# Altium PCB Wearable Air Quality Pendant.pcbdoc
Units mil, origin at the board's own origin, x right, y up, seen from the top; angles counter-clockwise.
Board outline 1917.32 x 1784.06 mil, 2 copper layers (Top Layer, Bottom Layer); 53 components, 58 nets, 184 pads, 66 vias.
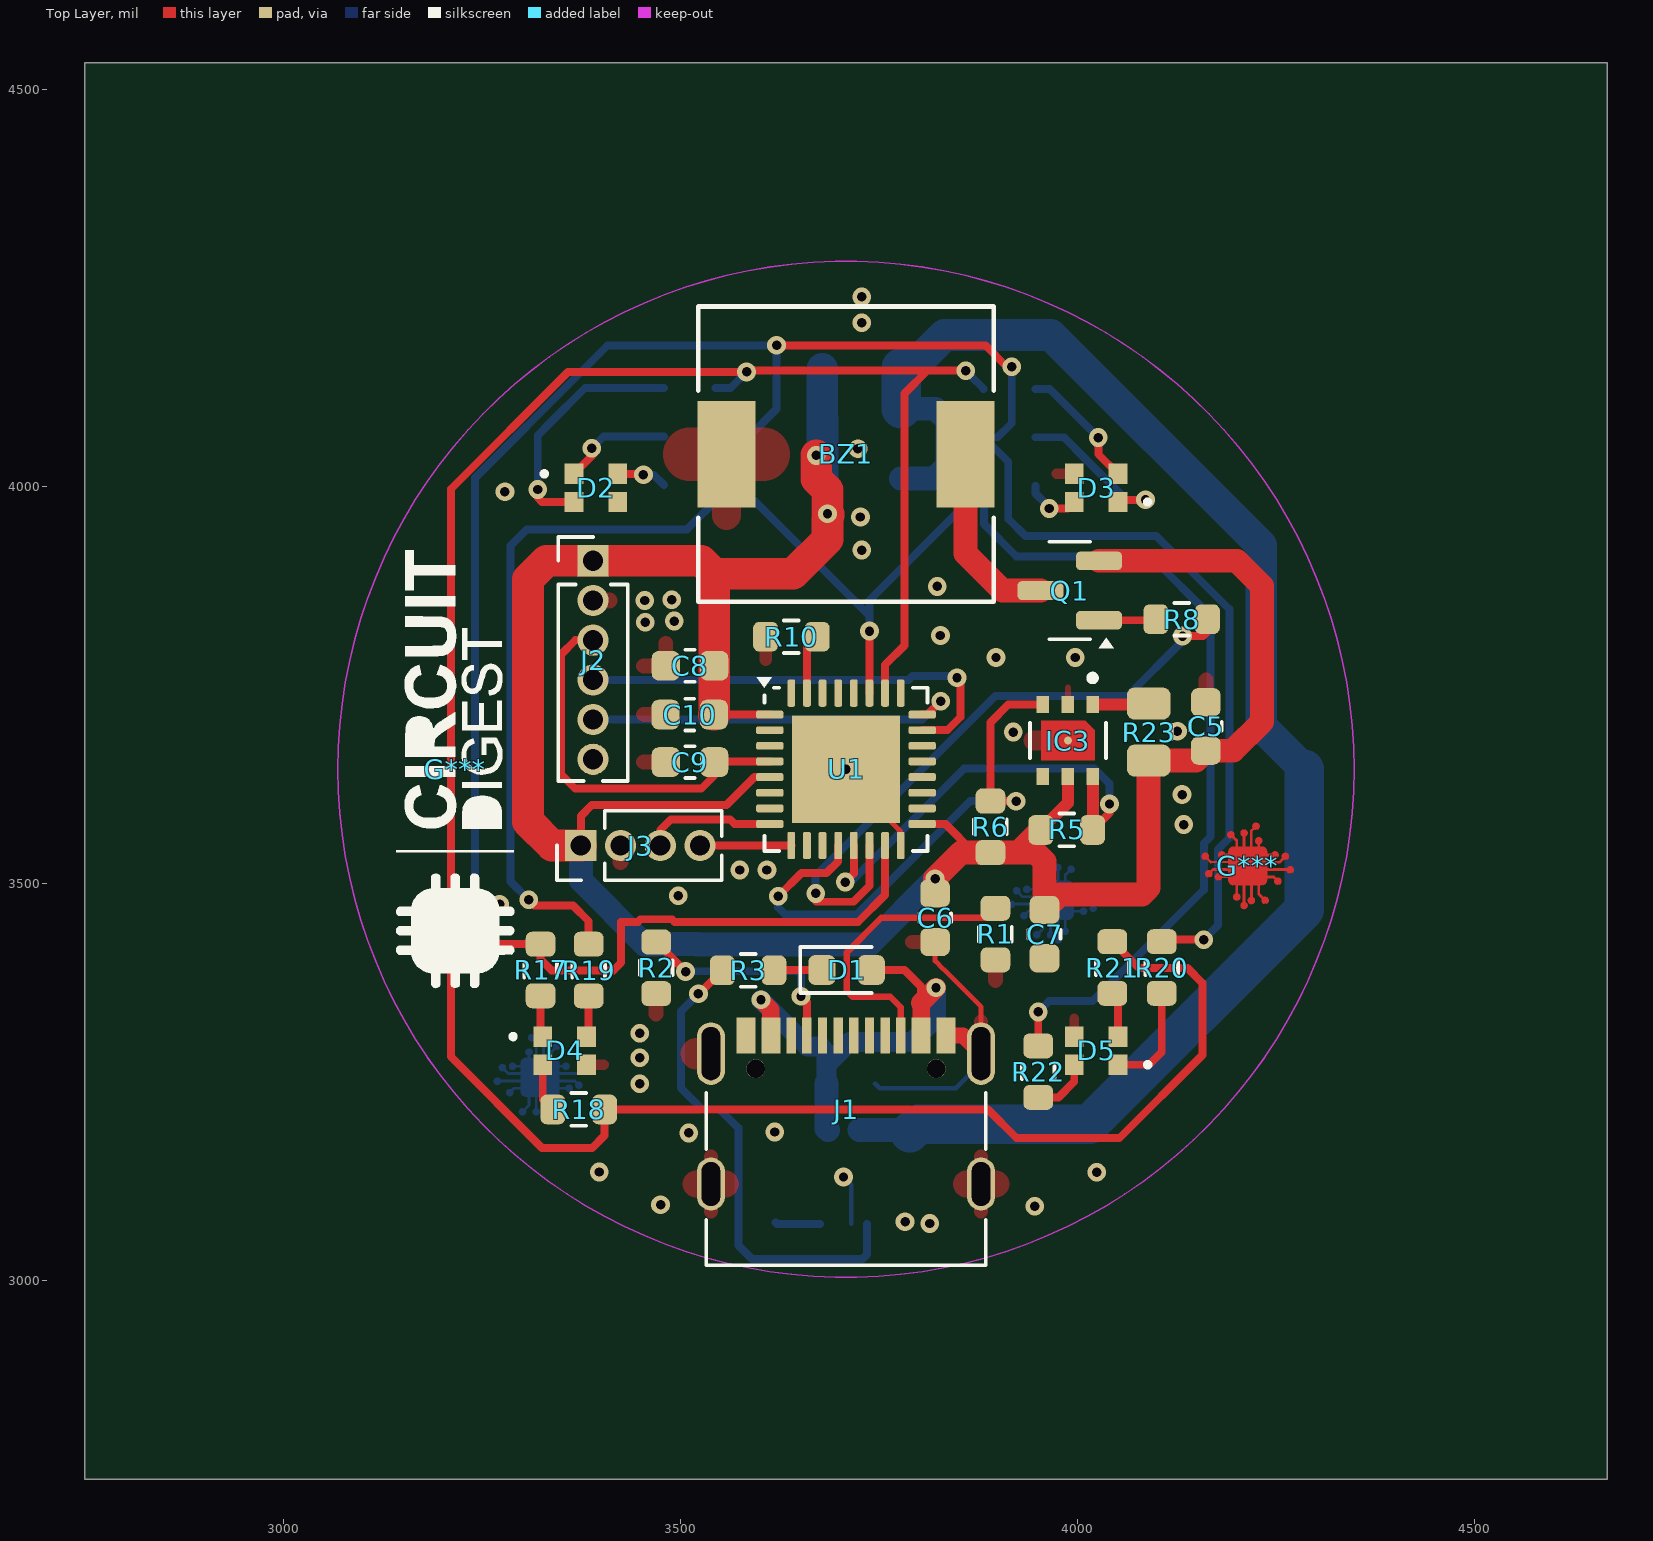
[diagram p0: Top Layer view]
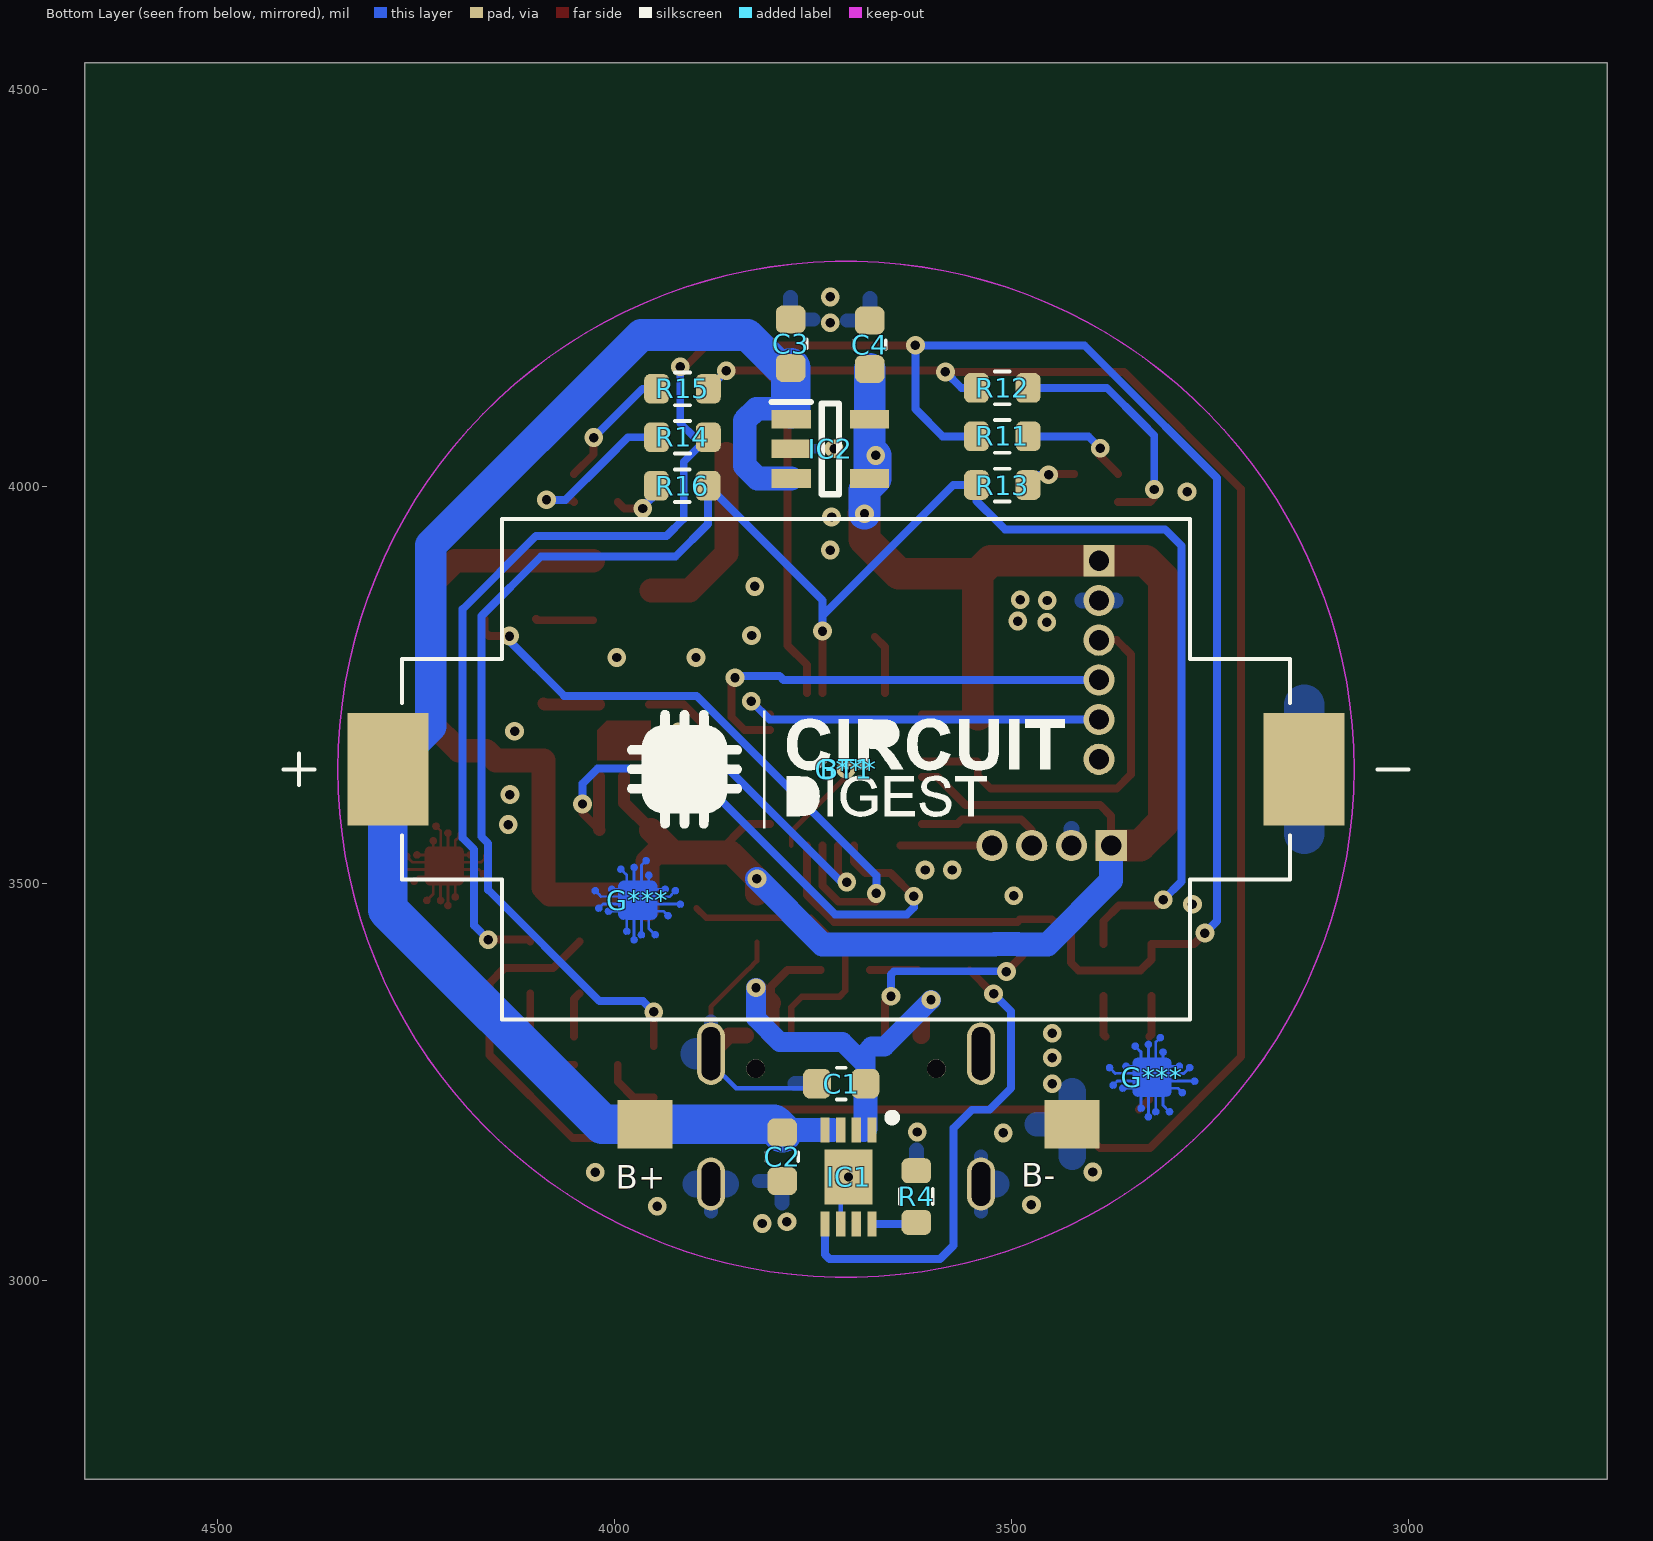
[diagram p1: Bottom Layer view, seen from below]

## Layer stack, top to bottom
Top Layer: signal copper (thickness not stored)
Dielectric: dielectric 12.6, FR-4, Dk 4.8
Bottom Layer: signal copper (thickness not stored)

## Board outline
4667.32,2750 2750,2750 2750,4534.06 4667.32,4534.06

## Design rules (kind name [scope] priority, off if disabled: settings)
BoardOutlineClearance safeClearance [All] p0: genericclearance=10 ignorepadtopadclearanceinfootprint=FALSE except(0: Track-CutoutEdge SMDPad-CutoutEdge THPad-CutoutEdge Via-CutoutEdge Fill-CutoutEdge Region-CutoutEdge Arc-SplitContinuation Track-SplitContinuation SMDPad-SplitContinuation THPad-SplitContinuation Via-SplitContinuation Fill-SplitContinuation Poly-SplitContinuation Region-SplitContinuation Text-SplitContinuation; 19.7: Track-OutlineEdge SMDPad-OutlineEdge THPad-OutlineEdge Via-OutlineEdge Fill-OutlineEdge Region-OutlineEdge Poly-OutlineEdge Text-OutlineEdge)
Clearance safeClearance [(InNet('GND') OR InNet('+BATT') OR InNet('NET-(BZ1-+)') OR InNet('NET-(D1-A)') OR InNet('/NRST') OR InNet('NET-(D1-K)') OR InNet('NET-(D2-RA)') OR InNet('NET-(D2-BA)') OR InNet('NET-(D2-GA)') OR InNet('NET-(D3-BA)') OR InNet('NET-(D3-GA)') OR InNet('NET-(D3-RA)') OR InNet('NET-(D4-RA)') OR InNet('NET-(D4-BA)') OR InNet('NET-(D4-GA)') OR InNet('NET-(D5-BA)') OR InNet('NET-(D5-GA)') OR InNet('NET-(D5-RA)') OR InNet('NET-(IC1-PROG)') OR InNet('NET-(IC1-STAT)') OR InNet('/SCL') OR InNet('/SDA') OR InNet('NET-(J1-CC2)') OR InNet('NET-(J1-CC1)') OR InNet('/SWDIO') OR InNet('/SWCLK') OR InNet('/TX') OR InNet('/RX') OR InNet('NET-(Q1-B)') OR InNet('/BUZ') OR InNet('/BOOT0') OR InNet('/R_LED') OR InNet('/G_LED') OR InNet('/B_LED') OR InNet('+2.5V') OR InNet('NET-(IC3-VDD)') OR InNet('UNCONNECTED-(U1-PC14-PAD2)') OR InNet('UNCONNECTED-(U1-PC15-PAD3)') OR InNet('/ADC') OR InNet('UNCONNECTED-(U1-PA1-PAD7)') OR InNet('UNCONNECTED-(U1-PA4-PAD10)') OR InNet('UNCONNECTED-(U1-PA5-PAD11)') OR InNet('UNCONNECTED-(U1-PA8-PAD18)') OR InNet('UNCONNECTED-(U1-PA9-PAD19)') OR InNet('UNCONNECTED-(U1-PA10-PAD20)') OR InNet('UNCONNECTED-(U1-PA11-PAD21)') OR InNet('UNCONNECTED-(U1-PA12-PAD22)') OR InNet('UNCONNECTED-(U1-PA15-PAD25)') OR InNet('UNCONNECTED-(U1-PB5-PAD28)') OR InNet('UNCONNECTED-(U1-PB6-PAD29)') OR InNet('UNCONNECTED-(U1-PB7-PAD30)') OR InNet('UNCONNECTED-(J1-D+-PADA6)') OR InNet('UNCONNECTED-(J1-D--PADA7)') OR InNet('UNCONNECTED-(J1-SBU1-PADA8)') OR InNet('UNCONNECTED-(J1-D+-PADB6)') OR InNet('UNCONNECTED-(J1-D--PADB7)') OR InNet('UNCONNECTED-(J1-SBU2-PADB8)') OR InNet('UNCONNECTED-(IC1-NC-PAD7)'))] p1: gap=7 ignorepadtopadclearanceinfootprint=FALSE except(0: Track-Track Track-SMDPad SMDPad-SMDPad Track-THPad SMDPad-THPad THPad-THPad Track-Via SMDPad-Via THPad-Via Via-Via Track-Fill SMDPad-Fill THPad-Fill Via-Fill Fill-Fill Track-Region SMDPad-Region THPad-Region Via-Region Fill-Region Region-Region Track-Poly SMDPad-Poly THPad-Poly Via-Poly Fill-Poly Region-Poly Poly-Poly Track-Text SMDPad-Text THPad-Text Via-Text Fill-Text Region-Text Poly-Text Text-Text Track-Hole SMDPad-Hole THPad-Hole Via-Hole Fill-Hole Region-Hole Poly-Hole Text-Hole; 19.7: Track-Sheet SMDPad-Sheet THPad-Sheet Via-Sheet Fill-Sheet Region-Sheet Poly-Sheet Text-Sheet Sheet-Hole)
DiffPairsRouting differentialPair [All] p1: maxuncoupledlength=10 minlimit=6 maxlimit=6 mostfreqgap=6 toplayer_minwidth=5 toplayer_prefwidth=10 toplayer_maxwidth=100 bottomlayer_minwidth=5 bottomlayer_prefwidth=10 bottomlayer_maxwidth=100
PasteMaskExpansion Common [All] p1: expansion=0
PlaneConnect innerPlane [All] p1: planeconnectstyle=Relief reliefexpansion=20 reliefentries=4 reliefconductorwidth=10 reliefairgap=10
PolygonConnect CopperRegion [All] p1: connectstyle=Relief reliefentries=4 reliefconductorwidth=0 polygonreliefangle="90 Angle" airgapwidth=10
PolygonConnect CopperRegion1 [All] p1: connectstyle=Relief reliefentries=4 reliefconductorwidth=0 polygonreliefangle="90 Angle" airgapwidth=10
RoutingVias viaSize [All] p1: viastyle="Through Hole" holewidth=12.0078 minholewidth=11.811 maxholewidth=236.2204 width=24.0158 minwidth=19.685 maxwidth=393.7008
SolderMaskExpansion Common [All] p1: useseparateexpansions=TRUE expansion=0 expansionbottom=0
Width trackWidth [All] p1: maxlimit=100 minlimit=5 preferedwidth=10

## Components (designator, comment, footprint, x,y, rotation, side; value= is the part's Value field where it differs from the comment)
BT1 "Battery_Cell" 1060:BAT_1060 3708.66,3644.29 r180 bottom
BZ1 "Buzzer" PKMCS0909E4000_R1:PKMCS0909E4000-R1_MUR 3708.66,4041.14 r180 top
C1 "4.7uF" Capacitor_SMD:C_0603_1608Metric 3714.76,3248.43 r180 bottom
C2 "4.7uF" Capacitor_SMD:C_0603_1608Metric 3788.98,3156.3 r90 bottom
C3 "2.2uF" Capacitor_SMD:C_0603_1608Metric 3778.35,4180.12 r270 bottom
C4 "2.2uF" Capacitor_SMD:C_0603_1608Metric 3678.74,4178.94 r270 bottom
C5 "1uF" Capacitor_SMD:C_0603_1608Metric 4161.81,3698.23 r270 top
C6 "4.7uF" Capacitor_SMD:C_0603_1608Metric 3820.87,3457.28 r90 top
C7 "1uF" Capacitor_SMD:C_0603_1608Metric 3958.66,3436.81 r90 top
C8 "100nF" Capacitor_SMD:C_0603_1608Metric 3512.2,3774.61 r0 top
C9 "100nF" Capacitor_SMD:C_0603_1608Metric 3512.2,3653.35 r0 top
C10 "100nF" Capacitor_SMD:C_0603_1608Metric 3511.81,3713.19 r0 top
D1 "LED_Small" LED_SMD:LED_0603_1608Metric 3709.45,3391.54 r0 top
D2 "LED_RGBK" EAST1616RGBA1:EAST1616RGBA1 3393.7,3998.62 r180 top
D3 "LED_RGBK" EAST1616RGBA1:EAST1616RGBA1 4023.62,3998.62 r0 top
D4 "LED_RGBK" EAST1616RGBA1:EAST1616RGBA1 3354.33,3289.96 r180 top
D5 "LED_RGBK" EAST1616RGBA1:EAST1616RGBA1 4023.62,3289.96 r0 top
G*** "LOGO" LOGO#1 3216.54,3644.29 r90 top
G*** "LOGO" LOGO#2 4214.57,3522.64 r0 top
G*** "LOGO" LOGO#2 3323.23,3256.5 r180 bottom
G*** "LOGO" LOGO#1 3708.66,3644.29 r180 bottom
G*** "LOGO" LOGO#2 3970.87,3479.33 r180 bottom
IC1 "MCP73832T-2ACI_MC" MCP73832T-2ACI_MC:SON50P300X200X100-9N-D 3705.51,3130.91 r270 bottom
IC2 "ADPL44002AUJZ" ADPL44002AUJZ-3.3-R7:SOT95P280X100-5N 3728.35,4047.83 r180 bottom
IC3 "SGP40-D-R4" SGP40_D_R4:XCDR_SGP40-D-R4 3988.19,3680.51 r270 top
J1 "USB_C_Receptacle_USB2.0_16P" Connector_USB:USB_C_Receptacle_Palconn_UTC16-G 3708.66,3210.24 r0 top
J2 "SWD" Connector_PinHeader_1.27mm:PinHeader_1x06_P1.27mm_Vertical 3390.16,3906.89 r0 top
J3 "UART" Connector_PinHeader_1.27mm:PinHeader_1x04_P1.27mm_Vertical 3374.8,3548.23 r90 top
Q1 "SS8550" Package_TO_SOT_SMD:SOT-23 3990.35,3869.39 r180 top
R1 "5.1K" Resistor_SMD:R_0603_1608Metric 3896.85,3436.81 r90 top
R2 "5.1K" Resistor_SMD:R_0603_1608Metric 3469.68,3394.29 r90 top
R3 "470R" Resistor_SMD:R_0603_1608Metric 3585.43,3391.14 r0 top
R4 "2K" Resistor_SMD:R_0603_1608Metric 3620.08,3106.3 r270 bottom
R5 "4.7K" Resistor_SMD:R_0603_1608Metric 3986.61,3567.91 r180 top
R6 "4.7K" Resistor_SMD:R_0603_1608Metric 3890.55,3571.85 r270 top
R8 "1K" Resistor_SMD:R_0603_1608Metric 4131.3,3833.27 r180 top
R10 "100K" Resistor_SMD:R_0603_1608Metric 3639.96,3811.22 r0 top
R11 "470R" Resistor_SMD:R_0603_1608Metric 3511.81,4063.58 r180 bottom
R12 "470R" Resistor_SMD:R_0603_1608Metric 3511.81,4124.61 r180 bottom
R13 "470R" Resistor_SMD:R_0603_1608Metric 3511.81,4002.17 r180 bottom
R14 "470R" Resistor_SMD:R_0603_1608Metric 3914.57,4062.4 r0 bottom
R15 "470R" Resistor_SMD:R_0603_1608Metric 3914.57,4123.43 r0 bottom
R16 "470R" Resistor_SMD:R_0603_1608Metric 3914.96,4001.38 r0 bottom
R17 "470R" Resistor_SMD:R_0603_1608Metric 3324.02,3391.54 r270 top
R18 "470R" Resistor_SMD:R_0603_1608Metric 3372.05,3215.94 r180 top
R19 "470R" Resistor_SMD:R_0603_1608Metric 3384.65,3391.54 r270 top
R20 "470R" Resistor_SMD:R_0603_1608Metric 4106.3,3394.68 r270 top
R21 "470R" Resistor_SMD:R_0603_1608Metric 4044.09,3394.68 r270 top
R22 "470R" Resistor_SMD:R_0603_1608Metric 3950.79,3263.58 r270 top
R23 "4.7R" Resistor_SMD:R_0805_2012Metric 4089.76,3691.14 r270 top
U1 "STM32U083KCUx" Package_DFN_QFN:QFN-32-1EP_5x5mm_P0.5mm_EP3.45x3.45mm 3708.66,3644.29 r0 top
? "device_f053" footprint_3556 3961.81,3197.44 r270 bottom
? "device_f053" footprint_3556 3424.02,3197.44 r90 bottom

## Footprints (in the part's own frame and the unit in brackets; to place one, negate y for a bottom-side part, rotate by r counter-clockwise, add the part's x,y. Pads: shape width x height; smd on the part's side, far side on the other; paste and mask are expansions set on the pad)
1060:BAT_1060 [mm]
  rect 2.59x3.61 smd: N(14.655,0) P(-14.655,0)
  silkscreen extent -18,-8 18,8
ADPL44002AUJZ-3.3-R7:SOT95P280X100-5N [mm]
  rect 1.25x0.6 smd: 1(-1.25,0.95) 2(-1.25,0) 3(-1.25,-0.95) 4(1.25,-0.95) 5(1.25,0.95)
  silkscreen extent -1.88,-1.45 0.27,1.5
Capacitor_SMD:C_0603_1608Metric [mm]
  rrect50% 0.9x0.95 smd: 1(-0.775,0) 2(0.775,0)
  silkscreen extent -0.14,-0.51 0.14,0.51
Connector_PinHeader_1.27mm:PinHeader_1x04_P1.27mm_Vertical [mm]
  rect 1x1 hole 0.65: 1(0,0)
  round 1 hole 0.65: 2(0,-1.27) 3(0,-2.54) 4(0,-3.81)
  silkscreen extent -1.11,-4.5 1.11,0.76
Connector_PinHeader_1.27mm:PinHeader_1x06_P1.27mm_Vertical [mm]
  rect 1x1 hole 0.65: 1(0,0)
  round 1 hole 0.65: 2(0,-1.27) 3(0,-2.54) 4(0,-3.81) 5(0,-5.08) 6(0,-6.35)
  silkscreen extent -1.11,-7.04 1.11,0.76
Connector_USB:USB_C_Receptacle_Palconn_UTC16-G [mm]
  rect 0.6x1.16 smd: A1(-3.2,2.51) A4(-2.4,2.51) A9(2.4,2.51) A12(3.2,2.51) B1(3.2,2.51) B4(2.4,2.51) B9(-2.4,2.51) B12(-3.2,2.51)
  rect 0.3x1.16 smd: A5(-1.25,2.51) A6(-0.25,2.51) A7(0.25,2.51) A8(1.25,2.51) B5(1.75,2.51) B6(0.75,2.51) B7(-0.75,2.51) B8(-1.75,2.51)
  oval 0.9x1.7 hole 0.6 slot 1.4 at 90 deg: S1(-4.32,-2.24) S1(4.32,-2.24)
  oval 0.9x2 hole 0.6 slot 1.7 at 90 deg: S1(-4.32,1.93) S1(4.32,1.93)
  round 0.6 hole 0.6 unplated: ""(-2.89,1.45) ""(2.89,1.45)
  silkscreen extent -4.47,-4.84 4.47,0.67
EAST1616RGBA1:EAST1616RGBA1 [mm]
  rect 0.6x0.65 smd: 1(0.7,-0.45) 2(0.7,0.45) 3(-0.7,-0.45) 4(-0.7,0.45)
  silkscreen extent 1.6,-0.5 1.7,-0.4
footprint_3556 [mm]
  rect 1.55x1.75 smd: 9(0,0)
LED_SMD:LED_0603_1608Metric [mm]
  rrect50% 0.875x0.95 smd: 1(-0.787,0) 2(0.788,0)
  silkscreen extent -1.48,-0.73 0.8,0.73
LOGO#1 [mil]
  silkscreen extent -275,-74 276,74
LOGO#2 [mil]
  Top Layer region: -5.26,-10.04 -5.2,-10.24 -5.15,-10.43 -5.1,-10.61 -5.06,-10.77 -5.02,-10.92 -4.98,-11.04 -4.96,-11.15 -4.94,-11.22 -4.92,-11.27 -4.92,-11.29 -4.92,-11.29 -4.93,-11.29 -4.98,-11.29 -5.07,-11.29 -5.18,-11.3 -5.32,-11.3 -5.49,-11.3 -5.68,-11.3 -5.9,-11.3 -6.15,-11.3 -6.41,-11.3 -6.7,-11.3 -7,-11.3 -7.33,-11.3 -7.67,-11.3 -8.02,-11.3 -8.39,-11.3 -8.77,-11.3 -9.16,-11.3 -9.56,-11.3 -9.64,-11.3 -14.36,-11.3 -14.5,-11.25 -14.75,-11.15 -14.97,-11.03 -15.16,-10.89 -15.32,-10.73 -15.43,-10.6 -15.53,-10.42 -15.62,-10.22 -15.69,-10 -15.74,-9.79 -15.75,-9.76 -15.74,-9.74 -15.71,-9.72 -15.66,-9.7 -15.63,-9.69 -15.57,-9.67 -15.49,-9.64 -15.37,-9.59 -15.24,-9.55 -15.09,-9.49 -14.92,-9.43 -14.74,-9.37 -14.55,-9.3 -14.37,-9.23 -13.17,-8.8 -9.38,-8.8 -5.6,-8.8
  Top Layer region: 10.76,-8.85 10.77,-8.88 10.78,-8.94 10.8,-9.02 10.83,-9.13 10.87,-9.26 10.91,-9.41 10.96,-9.58 11.01,-9.76 11.06,-9.95 11.1,-10.09 11.15,-10.28 11.2,-10.47 11.25,-10.64 11.29,-10.8 11.33,-10.94 11.36,-11.06 11.39,-11.16 11.41,-11.23 11.42,-11.27 11.43,-11.28 11.42,-11.29 11.4,-11.29 11.37,-11.29 11.32,-11.29 11.26,-11.29 11.18,-11.29 11.09,-11.3 10.97,-11.3 10.83,-11.3 10.68,-11.3 10.5,-11.3 10.29,-11.3 10.07,-11.3 9.82,-11.3 9.54,-11.3 9.23,-11.3 8.9,-11.3 8.54,-11.3 8.14,-11.3 7.72,-11.3 7.26,-11.3 6.77,-11.3 6.71,-11.3 1.99,-11.3 1.82,-11.25 1.58,-11.15 1.37,-11.03 1.17,-10.88 1.01,-10.71 0.87,-10.52 0.75,-10.31 0.75,-10.29 0.71,-10.21 0.68,-10.11 0.65,-10.01 0.63,-9.91 0.61,-9.83 0.61,-9.8 0.61,-9.73 1.88,-9.26 3.16,-8.8 6.95,-8.8 10.74,-8.8
  Top Layer region: 14.11,-0.33 14.13,-0.35 14.17,-0.38 14.21,-0.43 14.28,-0.5 14.36,-0.59 14.39,-0.62 14.67,-0.93 14.24,-5.28 14.2,-5.66 14.16,-6.04 14.12,-6.41 14.09,-6.76 14.05,-7.1 14.02,-7.43 13.99,-7.75 13.96,-8.04 13.93,-8.32 13.9,-8.57 13.88,-8.81 13.86,-9.02 13.84,-9.2 13.82,-9.36 13.81,-9.49 13.8,-9.6 13.79,-9.67 13.79,-9.71 13.79,-9.71 13.77,-9.78 13.73,-9.87 13.69,-9.97 13.63,-10.08 13.57,-10.19 13.51,-10.3 13.45,-10.39 13.44,-10.41 13.29,-10.59 13.11,-10.77 12.92,-10.92 12.7,-11.06 12.61,-11.11 12.54,-11.14 12.45,-11.18 12.35,-11.21 12.28,-11.24 12.19,-11.27 12.13,-11.29 12.09,-11.3 12.07,-11.3 12.06,-11.3 12.06,-11.3 12.06,-11.3 12.05,-11.28 12.04,-11.23 12.02,-11.15 11.99,-11.05 11.96,-10.93 11.92,-10.78 11.87,-10.62 11.82,-10.44 11.77,-10.25 11.72,-10.05 11.71,-10.04 11.37,-8.79 11.7,-5.49 12.03,-2.19 13.04,-1.27 13.2,-1.13 13.35,-0.99 13.5,-0.86 13.63,-0.74 13.75,-0.63 13.85,-0.54 13.94,-0.46 14.01,-0.4 14.05,-0.36 14.08,-0.33 14.08,-0.33 14.09,-0.33
  Top Layer region: 14.39,11.3 14.45,11.28 14.47,11.28 14.72,11.18 14.94,11.06 15.13,10.92 15.3,10.76 15.44,10.57 15.56,10.36 15.65,10.13 15.71,9.92 15.74,9.77 15.3,5.36 15.25,4.87 15.2,4.42 15.16,4 15.12,3.61 15.09,3.25 15.05,2.92 15.02,2.62 14.99,2.35 14.97,2.11 14.95,1.89 14.93,1.7 14.91,1.53 14.89,1.38 14.88,1.26 14.87,1.15 14.86,1.07 14.85,1.01 14.84,0.96 14.84,0.94 14.83,0.93 14.83,0.93 14.81,0.91 14.77,0.87 14.71,0.82 14.64,0.75 14.56,0.68 14.49,0.62 14.41,0.54 14.33,0.47 14.26,0.41 14.21,0.37 14.18,0.34 14.17,0.33 14.16,0.35 14.12,0.38 14.07,0.44 14,0.52 13.91,0.61 13.81,0.72 13.7,0.85 13.57,0.98 13.44,1.13 13.32,1.26 13.18,1.42 13.05,1.56 12.93,1.7 12.82,1.82 12.72,1.93 12.64,2.03 12.57,2.11 12.52,2.16 12.49,2.2 12.48,2.21 12.48,2.23 12.48,2.28 12.49,2.36 12.5,2.47 12.51,2.61 12.53,2.78 12.55,2.97 12.57,3.18 12.59,3.41 12.62,3.66 12.64,3.94 12.67,4.22 12.7,4.52 12.73,4.84 12.76,5.16 12.8,5.49 12.8,5.52 13.13,8.81 13.72,10.05 13.81,10.25 13.9,10.43 13.98,10.61 14.06,10.77 14.13,10.91 14.19,11.04 14.24,11.14 14.28,11.22 14.31,11.28 14.32,11.31 14.32,11.31 14.34,11.31
  Top Layer region: -2,11.32 -1.96,11.3 -1.9,11.29 -1.83,11.26 -1.76,11.24 -1.69,11.21 -1.63,11.19 -1.62,11.18 -1.43,11.08 -1.25,10.95 -1.09,10.8 -0.97,10.67 -0.87,10.51 -0.78,10.34 -0.7,10.15 -0.65,9.96 -0.63,9.87 -0.63,9.86 -0.62,9.84 -0.62,9.82 -0.62,9.8 -0.62,9.77 -0.62,9.73 -0.63,9.69 -0.63,9.64 -0.63,9.57 -0.64,9.5 -0.65,9.41 -0.66,9.3 -0.67,9.18 -0.68,9.05 -0.69,8.89 -0.71,8.71 -0.73,8.52 -0.75,8.3 -0.78,8.06 -0.8,7.79 -0.83,7.5 -0.86,7.18 -0.9,6.83 -0.93,6.45 -0.98,6.05 -1.02,5.6 -1.05,5.35 -1.48,0.95 -1.81,0.65 -1.9,0.57 -1.98,0.5 -2.06,0.43 -2.11,0.38 -2.15,0.35 -2.16,0.34 -2.18,0.35 -2.21,0.39 -2.27,0.45 -2.35,0.53 -2.45,0.64 -2.57,0.76 -2.7,0.91 -2.86,1.08 -3.02,1.26 -3.18,1.44 -3.32,1.59 -3.44,1.73 -3.54,1.84 -3.62,1.93 -3.69,2.01 -3.74,2.07 -3.78,2.12 -3.81,2.16 -3.84,2.19 -3.85,2.22 -3.86,2.23 -3.86,2.25 -3.86,2.26 -3.86,2.28 -3.86,2.34 -3.85,2.43 -3.84,2.54 -3.82,2.69 -3.81,2.86 -3.79,3.05 -3.77,3.27 -3.74,3.5 -3.72,3.76 -3.69,4.03 -3.66,4.32 -3.63,4.62 -3.6,4.94 -3.57,5.26 -3.54,5.57 -3.21,8.82 -2.62,10.07 -2.53,10.26 -2.44,10.45 -2.35,10.62 -2.28,10.78 -2.21,10.92 -2.15,11.05 -2.1,11.15 -2.06,11.23 -2.04,11.29 -2.02,11.32 -2.02,11.32
  Top Layer region: 2.16,-0.34 2.17,-0.35 2.2,-0.37 2.23,-0.4 2.28,-0.45 2.34,-0.51 2.41,-0.59 2.5,-0.68 2.6,-0.79 2.72,-0.93 2.86,-1.09 3.01,-1.25 3.17,-1.43 3.31,-1.58 3.43,-1.71 3.53,-1.82 3.61,-1.92 3.68,-1.99 3.73,-2.06 3.77,-2.11 3.8,-2.15 3.82,-2.18 3.84,-2.2 3.85,-2.22 3.85,-2.23 3.85,-2.25 3.85,-2.26 3.85,-2.3 3.84,-2.38 3.83,-2.48 3.82,-2.61 3.8,-2.77 3.78,-2.94 3.77,-3.14 3.74,-3.35 3.72,-3.58 3.7,-3.82 3.67,-4.08 3.65,-4.34 3.62,-4.61 3.59,-4.88 3.56,-5.16 3.53,-5.43 3.51,-5.71 3.48,-5.98 3.45,-6.24 3.42,-6.5 3.4,-6.74 3.38,-6.98 3.35,-7.2 3.33,-7.4 3.31,-7.58 3.29,-7.74 3.28,-7.88 3.27,-7.99 3.26,-8.08 3.25,-8.13 3.25,-8.16 3.25,-8.16 3.23,-8.17 3.18,-8.19 3.11,-8.21 3.01,-8.25 2.89,-8.29 2.76,-8.34 2.61,-8.4 2.44,-8.46 2.27,-8.52 2.1,-8.58 1.92,-8.65 1.74,-8.71 1.57,-8.77 1.4,-8.83 1.24,-8.89 1.1,-8.94 0.97,-8.99 0.86,-9.03 0.77,-9.06 0.71,-9.08 0.67,-9.09 0.67,-9.09 0.65,-9.08 0.65,-9.06 0.66,-9.04 0.66,-8.99 0.67,-8.91 0.68,-8.79 0.7,-8.65 0.71,-8.48 0.73,-8.29 0.76,-8.07 0.78,-7.83 0.81,-7.57 0.84,-7.29 0.87,-6.99 0.9,-6.67 0.93,-6.34 0.96,-6 1,-5.65 1.04,-5.28 1.07,-4.98 1.47,-0.93 1.79,-0.64 1.88,-0.56 1.96,-0.49 2.03,-0.43 2.09,-0.38 2.12,-0.34 2.14,-0.33 2.14,-0.33
  Top Layer region: -14.16,-0.33 -14.16,-0.33 -14.13,-0.36 -14.09,-0.4 -14.03,-0.47 -13.95,-0.56 -13.86,-0.66 -13.76,-0.77 -13.66,-0.89 -13.54,-1.02 -13.42,-1.15 -13.3,-1.28 -13.18,-1.42 -13.07,-1.55 -12.95,-1.67 -12.85,-1.78 -12.76,-1.89 -12.68,-1.98 -12.61,-2.05 -12.56,-2.11 -12.53,-2.14 -12.53,-2.15 -12.49,-2.2 -12.78,-5.17 -12.81,-5.49 -12.85,-5.8 -12.88,-6.1 -12.9,-6.38 -12.93,-6.65 -12.96,-6.9 -12.98,-7.14 -13,-7.35 -13.02,-7.55 -13.04,-7.72 -13.06,-7.86 -13.07,-7.98 -13.08,-8.07 -13.09,-8.13 -13.09,-8.16 -13.09,-8.16 -13.11,-8.17 -13.16,-8.19 -13.23,-8.21 -13.33,-8.25 -13.44,-8.29 -13.58,-8.34 -13.73,-8.4 -13.89,-8.46 -14.06,-8.52 -14.24,-8.58 -14.41,-8.64 -14.59,-8.71 -14.76,-8.77 -14.93,-8.83 -15.09,-8.89 -15.23,-8.94 -15.36,-8.99 -15.47,-9.02 -15.56,-9.06 -15.63,-9.08 -15.66,-9.09 -15.67,-9.09 -15.69,-9.08 -15.69,-9.08 -15.68,-9.06 -15.68,-9.01 -15.67,-8.92 -15.66,-8.81 -15.65,-8.67 -15.63,-8.51 -15.61,-8.32 -15.59,-8.11 -15.57,-7.88 -15.54,-7.63 -15.52,-7.37 -15.49,-7.09 -15.46,-6.81 -15.43,-6.51 -15.4,-6.2 -15.37,-5.88 -15.34,-5.56 -15.3,-5.24 -15.27,-4.92 -15.24,-4.59 -15.21,-4.27 -15.17,-3.95 -15.14,-3.64 -15.11,-3.34 -15.08,-3.04 -15.05,-2.76 -15.03,-2.49 -15,-2.24 -14.98,-2 -14.95,-1.78 -14.93,-1.59 -14.92,-1.41 -14.9,-1.26 -14.89,-1.14 -14.88,-1.04 -14.87,-0.97 -14.87,-0.94 -14.86,-0.93 -14.85,-0.92 -14.81,-0.88 -14.76,-0.83 -14.69,-0.77 -14.6,-0.69 -14.52,-0.61 -14.41,-0.52 -14.33,-0.45 -14.27,-0.39 -14.23,-0.36 -14.19,-0.34 -14.17,-0.33
  Top Layer region: -2.23,-0.33 -2.19,-0.37 -2.14,-0.42 -2.08,-0.49 -2,-0.57 -1.95,-0.63 -1.86,-0.73 -1.79,-0.8 -1.75,-0.86 -1.71,-0.9 -1.69,-0.93 -1.68,-0.96 -1.68,-0.98 -1.68,-0.99 -1.68,-1.01 -1.69,-1.07 -1.7,-1.15 -1.71,-1.27 -1.72,-1.41 -1.74,-1.59 -1.76,-1.78 -1.78,-2.01 -1.81,-2.25 -1.83,-2.51 -1.86,-2.8 -1.89,-3.1 -1.92,-3.42 -1.96,-3.76 -1.99,-4.1 -2.03,-4.47 -2.06,-4.84 -2.1,-5.22 -2.12,-5.38 -2.17,-5.89 -2.22,-6.37 -2.26,-6.82 -2.3,-7.23 -2.34,-7.61 -2.38,-7.96 -2.41,-8.28 -2.44,-8.56 -2.47,-8.82 -2.49,-9.04 -2.51,-9.23 -2.53,-9.4 -2.54,-9.53 -2.56,-9.64 -2.57,-9.72 -2.57,-9.77 -2.58,-9.79 -2.6,-9.86 -2.65,-9.95 -2.69,-10.06 -2.75,-10.16 -2.8,-10.25 -2.84,-10.31 -2.99,-10.53 -3.18,-10.73 -3.39,-10.9 -3.62,-11.05 -3.88,-11.17 -4.08,-11.25 -4.17,-11.27 -4.22,-11.29 -4.25,-11.3 -4.27,-11.3 -4.28,-11.3 -4.28,-11.3 -4.28,-11.29 -4.29,-11.27 -4.3,-11.22 -4.32,-11.15 -4.35,-11.04 -4.39,-10.92 -4.43,-10.77 -4.47,-10.61 -4.52,-10.43 -4.58,-10.24 -4.63,-10.04 -4.63,-10.03 -4.97,-8.79 -4.64,-5.49 -4.6,-5.09 -4.57,-4.73 -4.53,-4.4 -4.5,-4.1 -4.48,-3.82 -4.45,-3.58 -4.43,-3.36 -4.41,-3.16 -4.39,-2.99 -4.38,-2.84 -4.36,-2.71 -4.35,-2.59 -4.34,-2.5 -4.33,-2.42 -4.32,-2.35 -4.31,-2.3 -4.31,-2.26 -4.3,-2.22 -4.29,-2.2 -4.29,-2.18 -4.29,-2.17 -4.28,-2.16 -4.28,-2.16 -4.27,-2.15 -4.25,-2.14 -4.21,-2.1 -4.15,-2.04 -4.06,-1.96 -3.96,-1.87 -3.85,-1.77 -3.72,-1.65 -3.58,-1.52 -3.43,-1.39 -3.27,-1.24 -3.24,-1.22 -3.08,-1.08 -2.94,-0.94 -2.79,-0.81 -2.67,-0.7 -2.55,-0.59 -2.45,-0.5 -2.37,-0.43 -2.3,-0.37 -2.26,-0.34 -2.24,-0.32 -2.24,-0.32
  Top Layer region: 12.19,31.59 12.19,31.55 12.19,31.39 12.2,31.26 12.22,31.15 12.26,31.04 12.3,30.92 12.33,30.86 12.42,30.7 12.51,30.56 12.63,30.43 12.69,30.37 12.87,30.22 13.07,30.1 13.29,30.01 13.52,29.95 13.63,29.93 13.7,29.93 13.8,29.93 13.9,29.93 14.01,29.94 14.1,29.96 14.14,29.96 14.36,30.03 14.57,30.12 14.76,30.24 14.94,30.39 15.09,30.56 15.18,30.7 15.29,30.9 15.37,31.12 15.41,31.33 15.42,31.55 15.41,31.76 15.37,31.97 15.3,32.17 15.21,32.36 15.09,32.54 14.95,32.7 14.79,32.84 14.61,32.96 14.41,33.06 14.19,33.13 14.13,33.14 14.02,33.16 13.89,33.17 13.75,33.17 13.61,33.16 13.49,33.15 13.42,33.13 13.18,33.05 12.97,32.94 12.78,32.81 12.61,32.65 12.47,32.47 12.45,32.44 12.36,32.3 12.3,32.16 12.24,32.01 12.23,31.95 12.21,31.89 12.2,31.83 12.19,31.77 12.19,31.69
  Top Layer region: 45.74,12.13 45.74,11.91 45.75,11.88 45.79,11.63 45.87,11.4 45.98,11.19 46.12,10.99 46.26,10.85 46.43,10.7 46.62,10.58 46.83,10.49 47.05,10.43 47.28,10.4 47.53,10.41 47.66,10.42 47.84,10.47 48.03,10.54 48.11,10.58 48.31,10.7 48.49,10.84 48.64,11.01 48.77,11.2 48.88,11.41 48.95,11.63 48.97,11.71 48.99,11.81 48.99,11.93 48.99,12.06 48.99,12.19 48.98,12.31 48.97,12.36 48.91,12.57 48.81,12.78 48.69,12.97 48.55,13.15 48.38,13.3 48.19,13.43 47.99,13.53 47.77,13.6 47.76,13.61 47.61,13.63 47.45,13.65 47.28,13.65 47.11,13.63 46.99,13.61 46.77,13.54 46.57,13.44 46.38,13.31 46.21,13.15 46.18,13.13 46.04,12.95 45.92,12.76 45.83,12.56 45.77,12.35
  Top Layer region: 36.41,-19.43 36.42,-19.5 36.42,-19.55 36.43,-19.61 36.45,-19.67 36.45,-19.7 36.53,-19.93 36.63,-20.14 36.77,-20.33 36.92,-20.49 37.1,-20.64 37.3,-20.76 37.51,-20.85 37.75,-20.91 37.86,-20.92 37.99,-20.93 38.14,-20.92 38.28,-20.91 38.4,-20.88 38.42,-20.88 38.61,-20.82 38.8,-20.72 38.99,-20.61 39.15,-20.47 39.29,-20.32 39.3,-20.32 39.39,-20.19 39.47,-20.03 39.55,-19.87 39.6,-19.72 39.61,-19.69 39.64,-19.56 39.65,-19.41 39.65,-19.25 39.64,-19.09 39.63,-18.95 39.61,-18.89 39.53,-18.67 39.43,-18.46 39.29,-18.27 39.14,-18.09 38.96,-17.95 38.76,-17.83 38.54,-17.73 38.43,-17.7 38.31,-17.68 38.18,-17.66 38.03,-17.66 37.89,-17.66 37.75,-17.67 37.64,-17.7 37.63,-17.7 37.41,-17.78 37.2,-17.89 37,-18.03 36.86,-18.16 36.72,-18.32 36.61,-18.49 36.52,-18.67 36.47,-18.81 36.45,-18.87 36.44,-18.92 36.43,-18.98 36.42,-19.05 36.42,-19.13 36.42,-19.24 36.41,-19.35
  Top Layer region: 20.38,-43.56 20.39,-43.71 20.41,-43.85 20.42,-43.91 20.49,-44.14 20.59,-44.35 20.72,-44.54 20.87,-44.71 21.03,-44.85 21.22,-44.97 21.42,-45.07 21.63,-45.14 21.85,-45.17 22.08,-45.18 22.29,-45.16 22.52,-45.1 22.73,-45.02 22.92,-44.91 23.1,-44.77 23.25,-44.62 23.38,-44.45 23.49,-44.26 23.57,-44.06 23.62,-43.85 23.65,-43.63 23.65,-43.41 23.61,-43.18 23.55,-42.95 23.54,-42.93 23.44,-42.72 23.31,-42.54 23.16,-42.37 22.98,-42.22 22.78,-42.09 22.73,-42.07 22.6,-42.01 22.48,-41.97 22.36,-41.94 22.24,-41.92 22.1,-41.91 22,-41.91 21.89,-41.91 21.81,-41.91 21.74,-41.92 21.69,-41.93 21.63,-41.94 21.58,-41.96 21.38,-42.03 21.2,-42.12 21.04,-42.24 20.88,-42.38 20.73,-42.55 20.66,-42.63 20.59,-42.74 20.53,-42.86 20.47,-42.99 20.43,-43.12 20.42,-43.14 20.4,-43.26 20.38,-43.4
  Top Layer region: 2.98,-43.51 2.98,-43.52 2.98,-43.67 2.99,-43.79 3.01,-43.91 3.04,-44.01 3.08,-44.12 3.12,-44.22 3.23,-44.41 3.37,-44.59 3.53,-44.75 3.71,-44.89 3.85,-44.97 4.05,-45.05 4.25,-45.11 4.29,-45.12 4.39,-45.14 4.51,-45.14 4.63,-45.14 4.76,-45.14 4.88,-45.13 4.98,-45.11 4.98,-45.11 5.21,-45.03 5.42,-44.93 5.61,-44.8 5.78,-44.65 5.92,-44.48 6.05,-44.28 6.14,-44.07 6.2,-43.85 6.21,-43.84 6.22,-43.72 6.23,-43.58 6.23,-43.43 6.22,-43.29 6.2,-43.16 6.18,-43.09 6.1,-42.87 5.99,-42.67 5.85,-42.48 5.69,-42.32 5.51,-42.17 5.3,-42.06 5.09,-41.97 5.01,-41.95 4.9,-41.93 4.76,-41.91 4.61,-41.91 4.45,-41.91 4.31,-41.93 4.2,-41.95 4.19,-41.95 3.96,-42.03 3.75,-42.14 3.56,-42.27 3.39,-42.43 3.25,-42.61 3.13,-42.82 3.04,-43.05 3.02,-43.09 3,-43.15 2.99,-43.2 2.98,-43.26 2.98,-43.32 2.98,-43.41
  Top Layer region: -6.29,-49.96 -6.29,-50.11 -6.28,-50.24 -6.26,-50.35 -6.24,-50.45 -6.2,-50.55 -6.15,-50.67 -6.14,-50.7 -6.01,-50.91 -5.87,-51.1 -5.7,-51.26 -5.5,-51.41 -5.5,-51.41 -5.33,-51.5 -5.14,-51.57 -4.94,-51.63 -4.79,-51.66 -4.71,-51.66 -4.61,-51.66 -4.49,-51.65 -4.37,-51.64 -4.26,-51.62 -4.19,-51.61 -3.97,-51.53 -3.76,-51.43 -3.57,-51.3 -3.4,-51.15 -3.25,-50.98 -3.13,-50.79 -3.03,-50.58 -3.01,-50.54 -2.95,-50.3 -2.92,-50.07 -2.92,-49.84 -2.95,-49.61 -3.01,-49.39 -3.1,-49.19 -3.22,-48.99 -3.36,-48.82 -3.53,-48.66 -3.71,-48.52 -3.92,-48.41 -3.97,-48.39 -4.11,-48.34 -4.25,-48.3 -4.39,-48.28 -4.54,-48.27 -4.62,-48.27 -4.73,-48.27 -4.82,-48.28 -4.9,-48.29 -4.98,-48.31 -5.02,-48.32 -5.26,-48.4 -5.47,-48.5 -5.67,-48.64 -5.84,-48.8 -5.99,-48.98 -6.12,-49.19 -6.13,-49.22 -6.19,-49.34 -6.23,-49.45 -6.26,-49.55 -6.28,-49.65 -6.29,-49.77 -6.29,-49.91
  Top Layer region: -15.47,-39.17 -15.45,-39.38 -15.39,-39.6 -15.31,-39.8 -15.21,-39.99 -15.07,-40.17 -14.91,-40.34 -14.85,-40.38 -14.68,-40.5 -14.49,-40.59 -14.29,-40.67 -14.17,-40.7 -14.1,-40.71 -13.99,-40.72 -13.88,-40.72 -13.77,-40.72 -13.66,-40.72 -13.57,-40.71 -13.57,-40.71 -13.34,-40.65 -13.13,-40.56 -12.93,-40.45 -12.75,-40.3 -12.6,-40.14 -12.46,-39.95 -12.35,-39.75 -12.33,-39.7 -12.26,-39.47 -12.23,-39.25 -12.22,-39.02 -12.25,-38.79 -12.31,-38.57 -12.41,-38.35 -12.49,-38.21 -12.63,-38.03 -12.8,-37.87 -12.98,-37.73 -13.18,-37.62 -13.34,-37.56 -13.47,-37.53 -13.58,-37.5 -13.71,-37.49 -13.85,-37.49 -13.86,-37.49 -14.1,-37.51 -14.33,-37.56 -14.54,-37.64 -14.74,-37.75 -14.93,-37.9 -14.99,-37.96 -15.15,-38.14 -15.27,-38.33 -15.36,-38.53 -15.43,-38.74 -15.46,-38.95
  Top Layer region: -38.49,-13.83 -38.49,-13.96 -38.49,-14.06 -38.47,-14.15 -38.46,-14.24 -38.43,-14.33 -38.4,-14.41 -38.3,-14.62 -38.18,-14.81 -38.03,-14.98 -37.86,-15.13 -37.67,-15.25 -37.46,-15.35 -37.24,-15.42 -37.09,-15.45 -36.99,-15.46 -36.87,-15.46 -36.73,-15.45 -36.6,-15.44 -36.5,-15.42 -36.29,-15.35 -36.09,-15.25 -35.9,-15.13 -35.73,-14.99 -35.63,-14.87 -35.49,-14.67 -35.39,-14.47 -35.31,-14.26 -35.27,-14.05 -35.26,-13.83 -35.27,-13.62 -35.31,-13.42 -35.38,-13.21 -35.47,-13.02 -35.59,-12.85 -35.73,-12.69 -35.9,-12.54 -36.09,-12.42 -36.3,-12.32 -36.4,-12.28 -36.63,-12.23 -36.85,-12.21 -37.08,-12.23 -37.3,-12.27 -37.51,-12.34 -37.72,-12.45 -37.9,-12.58 -38.03,-12.69 -38.16,-12.84 -38.27,-13 -38.36,-13.17 -38.43,-13.36 -38.45,-13.4 -38.46,-13.47 -38.48,-13.53 -38.48,-13.58 -38.49,-13.65 -38.49,-13.74
  Top Layer region: 51.91,-4.95 51.91,-5.17 51.94,-5.39 52,-5.61 52.1,-5.82 52.18,-5.95 52.31,-6.13 52.48,-6.29 52.67,-6.42 52.87,-6.53 53.09,-6.62 53.21,-6.65 53.3,-6.66 53.4,-6.67 53.52,-6.67 53.64,-6.67 53.75,-6.66 53.84,-6.65 53.84,-6.65 54.07,-6.59 54.28,-6.49 54.47,-6.37 54.65,-6.23 54.8,-6.06 54.93,-5.87 55.04,-5.66 55.11,-5.44 55.12,-5.39 55.13,-5.33 55.14,-5.25 55.14,-5.16 55.14,-5.04 55.14,-4.93 55.14,-4.84 55.13,-4.78 55.12,-4.72 55.11,-4.67 55.1,-4.61 55.09,-4.59 55.01,-4.37 54.89,-4.16 54.75,-3.98 54.58,-3.82 54.39,-3.68 54.24,-3.59 54.06,-3.52 53.88,-3.46 53.69,-3.43 53.61,-3.43 53.38,-3.43 53.16,-3.47 52.94,-3.54 52.73,-3.64 52.68,-3.66 52.49,-3.8 52.33,-3.96 52.19,-4.13 52.08,-4.32 52,-4.52 51.94,-4.74
  Top Layer region: 32.81,13.86 32.81,13.64 32.85,13.41 32.91,13.2 33.01,12.99 33.06,12.9 33.2,12.71 33.37,12.55 33.55,12.41 33.75,12.3 33.96,12.22 34.17,12.17 34.4,12.15 34.63,12.17 34.69,12.18 34.92,12.23 35.13,12.31 35.32,12.43 35.5,12.57 35.55,12.61 35.71,12.79 35.84,12.98 35.94,13.2 36.01,13.43 36.03,13.51 36.04,13.6 36.05,13.71 36.05,13.83 36.04,13.96 36.03,14.08 36.01,14.17 36,14.22 35.92,14.44 35.82,14.65 35.68,14.83 35.55,14.97 35.37,15.12 35.17,15.25 34.96,15.34 34.75,15.4 34.53,15.43 34.3,15.43 34.08,15.4 33.86,15.33 33.65,15.24 33.51,15.15 33.41,15.08 33.3,14.98 33.2,14.87 33.11,14.76 33.08,14.72 32.97,14.52 32.88,14.31 32.83,14.09
  Top Layer region: 378 vertices and 0 holes, not listed, extent -22.18,-22.22 22.18,22.23
  Top Layer region: -50.64,-10.07 -50.63,-10.26 -50.6,-10.44 -50.55,-10.6 -50.55,-10.6 -50.47,-10.8 -50.35,-10.99 -50.21,-11.16 -50.04,-11.32 -49.86,-11.45 -49.67,-11.55 -49.56,-11.59 -49.44,-11.63 -49.34,-11.66 -49.23,-11.67 -49.12,-11.68 -48.98,-11.68 -48.97,-11.68 -48.86,-11.67 -48.77,-11.67 -48.7,-11.66 -48.63,-11.64 -48.58,-11.63 -48.35,-11.54 -48.15,-11.43 -47.96,-11.29 -47.85,-11.19 -47.7,-11.01 -47.58,-10.81 -47.49,-10.6 -47.42,-10.38 -47.4,-10.24 -47.39,-10.03 -47.41,-9.82 -47.46,-9.61 -47.53,-9.4 -47.62,-9.23 -47.68,-9.14 -47.76,-9.04 -47.85,-8.94 -47.95,-8.84 -48.05,-8.75 -48.14,-8.68 -48.2,-8.64 -48.41,-8.54 -48.62,-8.47 -48.84,-8.43 -49.05,-8.42 -49.26,-8.44 -49.47,-8.49 -49.67,-8.56 -49.86,-8.66 -50.03,-8.79 -50.19,-8.93 -50.33,-9.1 -50.45,-9.29 -50.54,-9.49 -50.61,-9.72 -50.61,-9.74 -50.63,-9.9
  Top Layer region: -55.2,11.94 -55.17,11.71 -55.1,11.49 -55.03,11.31 -54.91,11.11 -54.77,10.93 -54.61,10.77 -54.42,10.64 -54.23,10.54 -54.02,10.46 -53.8,10.42 -53.57,10.4 -53.34,10.41 -53.15,10.45 -52.95,10.52 -52.75,10.62 -52.57,10.75 -52.41,10.91 -52.26,11.09 -52.24,11.12 -52.16,11.24 -52.1,11.36 -52.05,11.48 -52.01,11.61 -51.99,11.68 -51.98,11.73 -51.97,11.79 -51.96,11.86 -51.96,11.94 -51.96,12.03 -51.96,12.15 -51.97,12.25 -51.97,12.32 -51.98,12.38 -51.99,12.41 -52.07,12.64 -52.18,12.85 -52.31,13.04 -52.46,13.21 -52.64,13.35 -52.84,13.47 -53.04,13.56 -53.27,13.62 -53.49,13.65 -53.73,13.64 -53.96,13.6 -54.1,13.56 -54.29,13.48 -54.46,13.38 -54.63,13.26 -54.71,13.18 -54.87,13 -55,12.81 -55.09,12.6 -55.16,12.39 -55.19,12.16
  Top Layer region: -34.42,13.84 -34.42,13.71 -34.41,13.58 -34.4,13.48 -34.4,13.45 -34.33,13.23 -34.24,13.03 -34.17,12.9 -34.02,12.71 -33.85,12.55 -33.67,12.41 -33.47,12.3 -33.26,12.22 -33.04,12.17 -32.82,12.15 -32.58,12.17 -32.53,12.18 -32.31,12.23 -32.1,12.32 -31.91,12.43 -31.73,12.56 -31.58,12.72 -31.45,12.89 -31.34,13.08 -31.26,13.28 -31.21,13.49 -31.18,13.7 -31.18,13.92 -31.22,14.15 -31.27,14.32 -31.36,14.53 -31.48,14.73 -31.63,14.9 -31.8,15.06 -31.99,15.19 -32.21,15.29 -32.36,15.34 -32.51,15.38 -32.67,15.39 -32.84,15.4 -33.01,15.39 -33.11,15.38 -33.34,15.31 -33.55,15.22 -33.74,15.1 -33.92,14.96 -34.07,14.79 -34.2,14.61 -34.3,14.41 -34.38,14.19 -34.41,14.06 -34.42,13.96
  Top Layer region: -22.82,39.12 -22.82,38.98 -22.79,38.74 -22.74,38.52 -22.65,38.31 -22.52,38.12 -22.37,37.93 -22.34,37.91 -22.16,37.75 -21.97,37.62 -21.76,37.53 -21.53,37.46 -21.47,37.45 -21.37,37.43 -21.24,37.43 -21.11,37.43 -20.98,37.44 -20.86,37.46 -20.81,37.47 -20.58,37.55 -20.37,37.66 -20.18,37.79 -20.01,37.95 -19.86,38.14 -19.74,38.34 -19.65,38.56 -19.63,38.61 -19.62,38.67 -19.6,38.72 -19.6,38.77 -19.59,38.83 -19.59,38.9 -19.59,39 -19.59,39.07 -19.59,39.18 -19.59,39.26 -19.59,39.33 -19.6,39.38 -19.61,39.43 -19.62,39.49 -19.63,39.52 -19.72,39.74 -19.82,39.94 -19.96,40.12 -20.08,40.25 -20.18,40.34 -20.28,40.42 -20.37,40.48 -20.49,40.54 -20.52,40.55 -20.67,40.62 -20.82,40.66 -20.98,40.69 -21.16,40.7 -21.2,40.7 -21.31,40.69 -21.4,40.69 -21.47,40.68 -21.55,40.66 -21.6,40.65 -21.83,40.57 -22.03,40.47 -22.22,40.33 -22.39,40.18 -22.54,39.99 -22.66,39.79 -22.74,39.6 -22.78,39.44 -22.81,39.28
  Top Layer region: -6.24,41.44 -6.24,41.21 -6.21,40.99 -6.18,40.88 -6.09,40.66 -5.98,40.46 -5.84,40.28 -5.68,40.12 -5.51,39.98 -5.31,39.87 -5.1,39.79 -5,39.76 -4.94,39.75 -4.89,39.74 -4.86,39.73 -4.86,39.73 -4.83,39.73 -4.78,39.73 -4.71,39.73 -4.62,39.73 -4.57,39.73 -4.46,39.73 -4.37,39.74 -4.3,39.74 -4.24,39.76 -4.18,39.77 -4.15,39.78 -3.93,39.86 -3.74,39.97 -3.55,40.1 -3.41,40.24 -3.26,40.42 -3.14,40.62 -3.05,40.83 -3,41.05 -2.97,41.27 -2.97,41.5 -3.01,41.73 -3.08,41.96 -3.11,42.02 -3.21,42.22 -3.34,42.4 -3.5,42.56 -3.68,42.71 -3.88,42.82 -4.1,42.91 -4.17,42.94 -4.3,42.96 -4.45,42.98 -4.6,42.99 -4.76,42.98 -4.9,42.97 -4.94,42.96 -5.15,42.9 -5.36,42.81 -5.55,42.69 -5.73,42.55 -5.88,42.39 -5.95,42.29 -6.07,42.1 -6.15,41.89 -6.21,41.67
  Top Layer region: 8.78,49.95 8.78,49.78 8.79,49.76 8.83,49.52 8.89,49.29 8.99,49.09 9.12,48.9 9.27,48.73 9.28,48.71 9.47,48.56 9.67,48.44 9.89,48.34 10.11,48.28 10.34,48.26 10.57,48.26 10.79,48.3 11.01,48.37 11.22,48.47 11.41,48.6 11.59,48.76 11.6,48.77 11.75,48.95 11.87,49.15 11.96,49.36 12.02,49.58 12.05,49.8 12.05,50.02 12.01,50.25 11.95,50.47 11.85,50.68 11.76,50.82 11.63,50.99 11.47,51.14 11.29,51.27 11.1,51.37 10.89,51.46 10.82,51.48 10.66,51.51 10.49,51.52 10.31,51.52 10.15,51.51 10.1,51.5 9.87,51.43 9.65,51.34 9.46,51.22 9.28,51.07 9.13,50.91 9,50.72 8.9,50.51 8.87,50.43 8.82,50.26 8.79,50.1
  Top Layer region: 1983 vertices and 0 holes, not listed, extent -58.02,-54.29 58,54.3
  Top Layer lines w0: -58.01,11.94 -55.2,11.94 -58.01,11.94 ; -53.47,-10.07 -50.64,-10.07 -53.47,-10.07 ; -41.33,-13.83 -38.49,-13.83 -41.33,-13.83 ; -37.25,13.84 -34.42,13.84 -37.25,13.84 ; -25.68,39.12 -22.82,39.12 -25.68,39.12 ; -24.44,-7.62 -22.18,-7.62 -24.44,-7.62 ; -18.28,-39.17 -15.47,-39.17 -18.28,-39.17 ; -9.07,-49.96 -6.29,-49.96 -9.07,-49.96 ; -9.02,41.44 -6.24,41.44 -9.02,41.44 ; 0.13,-43.51 2.98,-43.51 0.13,-43.51 ; 5.94,49.95 8.78,49.95 5.94,49.95 ; 9.35,31.59 12.19,31.59 9.35,31.59 ; 17.53,-43.56 20.38,-43.56 17.53,-43.56 ; 22.18,-4.95 51.91,-4.95 22.18,-4.95 ; 22.18,13.86 32.81,13.86 22.18,13.86 ; 33.58,-19.43 36.41,-19.43 33.58,-19.43 ; 42.92,12.13 45.74,12.13 42.92,12.13
MCP73832T-2ACI_MC:SON50P300X200X100-9N-D [mm]
  rect 0.8x0.3 smd: 1(-1.5,0.75) 2(-1.5,0.25) 3(-1.5,-0.25) 4(-1.5,-0.75) 5(1.5,-0.75) 6(1.5,-0.25) 7(1.5,0.25) 8(1.5,0.75)
  rect 1.75x1.55 smd: 9(0,0)
  silkscreen extent -2.02,1.27 -1.78,1.52
Package_DFN_QFN:QFN-32-1EP_5x5mm_P0.5mm_EP3.45x3.45mm [mm]
  rrect50% 0.875x0.25 smd: 1(-2.437,1.75) 2(-2.437,1.25) 3(-2.437,0.75) 4(-2.437,0.25) 5(-2.437,-0.25) 6(-2.437,-0.75) 7(-2.437,-1.25) 8(-2.437,-1.75) 17(2.438,-1.75) 18(2.438,-1.25) 19(2.438,-0.75) 20(2.438,-0.25) 21(2.438,0.25) 22(2.438,0.75) 23(2.438,1.25) 24(2.438,1.75)
  rrect50% 0.25x0.875 smd: 9(-1.75,-2.437) 10(-1.25,-2.437) 11(-0.75,-2.437) 12(-0.25,-2.437) 13(0.25,-2.437) 14(0.75,-2.437) 15(1.25,-2.437) 16(1.75,-2.437) 25(1.75,2.438) 26(1.25,2.438) 27(0.75,2.438) 28(0.25,2.438) 29(-0.25,2.438) 30(-0.75,2.438) 31(-1.25,2.438) 32(-1.75,2.438)
  rect 3.45x3.45 smd: 33(0,0)
  rrect50% 0.93x0.93 smd: ""(-1.15,-1.15) ""(-1.15,0) ""(-1.15,1.15) ""(0,-1.15) ""(0,0) ""(0,1.15) ""(1.15,-1.15) ""(1.15,0) ""(1.15,1.15)
  silkscreen extent -2.85,-2.61 2.61,2.94
Package_TO_SOT_SMD:SOT-23 [mm]
  rrect50% 1.475x0.6 smd: 1(-0.938,0.95) 2(-0.938,-0.95) 3(0.937,0)
  silkscreen extent -1.4,-1.56 0.65,1.84
PKMCS0909E4000_R1:PKMCS0909E4000-R1_MUR [mil]
  rect 73x134 smd: 1(-150.5,0) 2(150.5,0)
  silkscreen extent -186,-186 186,186
Resistor_SMD:R_0603_1608Metric [mm]
  rrect50% 0.8x0.95 smd: 1(-0.825,0) 2(0.825,0)
  silkscreen extent -0.24,-0.52 0.24,0.52
Resistor_SMD:R_0805_2012Metric [mm]
  rrect48% 1.025x1.4 smd: 1(-0.913,0) 2(0.913,0)
  silkscreen extent -0.23,-0.73 0.23,0.73
SGP40_D_R4:XCDR_SGP40-D-R4 [mm]
  rect 0.55x0.4 smd: 1(-1.15,0.8) 2(-1.15,0) 3(-1.15,-0.8) 4(1.15,-0.8) 5(1.15,0) 6(1.15,0.8)
  round 0.25 smd: 7(0,0)
  Top Layer region: 0.625,0.85 0.625,-0.85 -0.625,-0.85 -0.625,0.55 -0.325,0.85
  silkscreen extent -2.1,-1.22 0.56,1.22

## Via types
v1: diameter 23.62, hole 11.81, Top Layer to Bottom Layer, 66 vias

## Nets (pads, with @x,y where several pads share a name; then routed paths per layer and width w, separated by ;. In a path a pad name is that pad's centre, name@x,y a point inside that pad or via, vN(x,y) a via of type N, cw(c..) or ccw(c..) an arc to the next point about the centre after c; other vN are vias at no path point)
+2.5V: C4.2 C5.2 C6.2 C7.2 C8.2 C10.2 IC2.4 IC2.5 IC3.5 J2.1 J3.1 Q1.2 R5.2 R6.2 R23.2 U1.1 U1.5 U1.17 | length 3621.5
  Top Layer w10: J3.1 3374.8,3585.63 3388.58,3599.41 3558.31,3599.41 3593.35,3634.45 U1.5 ; C10.2 U1.1 ; U1.17 3833.86,3575.39 3869.29,3539.96 3869.29,3539.37 ; 3840.65,3539.37 R6.2
  Top Layer w15: R5.2 3988.19,3601.97 IC3.5
  Top Layer w30: C6.2 v1(3820.87,3506.5) 3853.74,3539.37 3869.29,3539.37 R6.2 3925.59,3539.37 ; R5.2 3925.59,3539.37 ; Q1.2 4200.89,3906.79 4232.68,3875 4232.68,3704.13 4196.26,3667.72 C5.2 4149.31,3655.22 R23.2 4089.76,3495.08 4081.5,3486.81 3977.95,3486.81 3958.66,3467.52 C7.2 3958.66,3528.15 3947.44,3539.37 3925.59,3539.37
  Top Layer w40: J3.1 3338.58,3548.23 3308.27,3578.54 3308.27,3883.66 3331.5,3906.89 J2.1 3526.38,3906.89 3542.72,3890.55 ; C10.2 3542.72,3713.58 C8.2 3542.72,3877.77 3542.72,3890.55 ; v1(3671.26,4039.57) 3671.26,4010.04 3685.43,3995.87 v1(3685.43,3965.94) ; v1@3687.05,3964.02 3687.05,3965.94 v1(3685.43,3965.94) ; 3542.72,3890.55 3641.93,3890.55 3685.43,3934.06 v1(3685.43,3965.94)
  Bottom Layer w30: J3.1 3374.8,3504.13 3455.12,3423.82 3491.84,3423.82 3492.31,3424.29 3521.08,3424.29 3521.55,3423.82 3738.19,3423.82 v1(3820.87,3506.5)
  Bottom Layer w40: C4.2 3678.74,4085.63 IC2.5 ; IC2.4 IC2.5 ; v1(3685.43,3965.94) 3685.43,3995.87 3671.26,4010.04 v1(3671.26,4039.57) 3679.13,4047.44 IC2.5
+BATT: ?.9@3961.81,3197.44 BT1.P C2.2 C3.2 IC1.3 IC1.4 IC2.1 IC2.3 | length 2009.4
  Bottom Layer w10: IC1.3 3725.59,3189.96 IC1.4 ; IC2.1 3777.56,4097.44 3778.35,4098.23
  Bottom Layer w30: 3725.59,3189.96 3785.83,3189.96 C2.2 ; IC2.3 3820.08,4010.43 3836.22,4026.57 3836.22,4083.27 3821.26,4098.23 3778.35,4098.23
  Bottom Layer w40: C3.2 3791.14,4149.61 3832.68,4191.14 3966.54,4191.14 4231.5,3926.18 4231.5,3698.43 BT1.P
  Bottom Layer w50: 3778.35,4098.23 C3.2 ; C2.2 3799.61,3197.44 4015.75,3197.44 4285.63,3467.32 BT1.P
/ADC: U1.6
/B_LED: R13.1 R16.1 R19.1 R22.1 U1.27 | length 2519
  Top Layer w10: v1(3309.06,3480.12) 3316.54,3472.64 3364.96,3472.64 3384.65,3452.95 R19.1 ; U1.27 v1(3738.19,3818.31) ; R22.1 v1(3950.79,3338.78)
  Bottom Layer w10: v1(3309.06,3480.12) 3286.22,3502.95 3286.22,3925.79 3306.69,3946.26 3322.44,3946.26 3508.27,3946.26 3516.14,3954.13 3544.29,3982.28 R13.1 3573.62,4002.17 3738.19,3837.6 v1(3738.19,3818.31) 3738.19,3857.09 R16.1 3882.48,3953.15 3923.62,3912.01 4092.91,3912.01 4167.72,3837.2 4167.72,3559.39 4159.25,3550.92 4159.25,3536.08 4159.25,3492.52 4019.29,3352.56 3964.57,3352.56 v1(3950.79,3338.78)
/BOOT0: R10.2 U1.31 | length 76.3
  Top Layer w10: U1.31 3659.45,3798.23 R10.2
/BUZ: R8.1 U1.14 | length 798.8
  Top Layer w10: v1(3670.47,3487.99) 3670.47,3478.82 3671.79,3477.51 3718.05,3477.51 3738.19,3497.64 U1.14 ; v1(4132.38,3812.05) 4158.23,3812.05 4163.78,3817.6 R8.1
  Bottom Layer w10: v1(3670.47,3487.99) 3670.47,3510.43 3896.85,3736.81 4063.5,3736.81 4132.38,3805.69 v1(4132.38,3812.05)
/G_LED: R12.1 R15.1 R18.1 R21.1 U1.26 | length 3275.4
  Top Layer w10: U1.26 3757.87,3775.79 3782.28,3800.2 3782.28,4117.52 3811.02,4146.26 3836.61,4146.26 ; v1(3859.45,4146.26) 3836.61,4146.26 ; R21.1 4077.36,3393.9 4138.58,3393.9 4157.48,3375 4157.48,3284.45 4052.76,3179.72 3923.62,3179.72 3887.4,3215.94 R18.1 3404.53,3183.07 3388.98,3167.52 3325.98,3167.52 3211.02,3282.48 3211.02,3997.05 3358.66,4144.69 v1(3583.46,4144.69) 3585.04,4146.26 3836.61,4146.26
  Bottom Layer w10: R12.1 3563.39,4124.61 v1(3583.46,4144.69) ; v1(3859.45,4146.26) 3864.57,4141.14 3864.57,4140.94 R15.1
/NRST: C9.2 J2.3 U1.4 | length 493.7
  Top Layer w10: J2.3 3367.72,3806.89 3349.61,3788.78 3349.61,3637.99 3367.72,3619.88 3526.38,3619.88 3542.72,3636.22 C9.2 3543.5,3654.13 U1.4
/R_LED: R11.1 R14.1 R17.1 R20.1 U1.15 | length 3211.3
  Top Layer w10: v1(3256.69,3437.99) 3270.47,3424.21 3323.82,3424.21 R17.1 3324.02,3404.92 3337.8,3391.14 3415.75,3391.14 3425.59,3400.98 3425.59,3452.17 3446.76,3452.17 3450.03,3455.43 3489.34,3455.43 3492.61,3452.17 3724.02,3452.17 3757.87,3486.02 U1.15 ; v1(3621.26,4178.15) 3884.25,4178.15 3911.21,4151.19 v1(3917.35,4151.19) ; R20.1 4108.86,3429.72 v1(4159.06,3429.72)
  Bottom Layer w10: v1(3256.69,3437.99) 3241.34,3453.35 3241.34,3486.02 3241.34,4010.96 3372.89,4142.52 3408.52,4178.15 v1(3621.26,4178.15) 3621.26,4097.83 3587.01,4063.58 R11.1 ; v1@3917.37,4144.11 3917.37,4080.17 3899.61,4062.4 R14.1 3912.99,4031.5 3912.99,3959.65 3934.65,3937.99 4099.21,3937.99 4191.34,3845.87 4191.34,3557.68 4177.17,3543.5 4177.17,3447.83 v1(4159.06,3429.72) ; v1@3917.35,4144.13 v1(3917.35,4151.19)
/RX: J3.4 U1.9 | length 115
  Top Layer w10: J3.4 3524.9,3548.33 U1.9
/SCL: IC3.6 R5.1 U1.13 | length 585
  Top Layer w10: v1(3707.81,3502.23) 3718.5,3512.92 U1.13 ; R5.1 4040.55,3589.37 v1(4040.55,3600.59)
  Top Layer w15: R5.1 4019.68,3568.5 IC3.6
  Bottom Layer w10: v1(3707.81,3502.23) 3714.5,3502.23 3857.35,3645.08 4021.65,3645.08 4040.55,3626.18 v1(4040.55,3600.59)
/SDA: IC3.3 R6.1 U1.12 | length 697
  Top Layer w10: v1(3623.23,3484.33) 3652.48,3513.58 3684.25,3513.58 3698.82,3528.15 U1.12 ; v1(3922.83,3604.13) 3890.75,3604.13 R6.1 3890.55,3703.35 3912.99,3725.79 IC3.3
  Bottom Layer w10: v1(3623.23,3484.33) 3623.23,3470.28 3631.89,3461.61 3722.44,3461.61 3864.96,3604.13 v1(3922.83,3604.13)
/SWCLK: J2.5 U1.24 | length 477.8
  Top Layer w10: U1.24 3811.02,3713.19 v1(3827.95,3730.12)
  Bottom Layer w10: J2.5 3804.72,3706.89 v1(3827.95,3730.12)
/SWDIO: J2.4 U1.23 | length 567.4
  Top Layer w10: U1.23 3836.22,3693.5 3846.85,3704.13 3852.68,3709.96 3852.68,3755.39 v1(3848.43,3759.65)
  Bottom Layer w10: J2.4 3787.4,3756.89 3792.13,3761.61 3846.46,3761.61 v1(3848.43,3759.65)
/TX: J3.3 U1.8 | length 165.6
  Top Layer w10: J3.3 3474.8,3567.91 3488.19,3581.3 3562.6,3581.3 3568.5,3575.39 U1.8
GND: ?.9@3424.02,3197.44 BT1.N BZ1.2 C1.1 C2.1 C3.1 C4.1 C5.1 C6.1 C7.1 C8.1 C9.1 C10.1 D2.4 D3.4 D4.4 D5.4 IC1.6 IC1.9 IC2.2 IC3.2 IC3.4 IC3.7 J1.A1 J1.A12 J1.B1 J1.B12 J1.S1 J2.2 J3.2 R1.1 R2.1 R4.1 R10.1 U1.16 U1.32 U1.33 | length 566.9
  Top Layer w6: v1(3708.66,3644.29) 3708.66,3634.84 3777.56,3565.94 U1.16 ; C6.1 3820.87,3402.95 3831.31,3392.51 3831.75,3392.51 3845.46,3378.79 3845.46,3378.36 3878.74,3345.08 J1.S1@3878.74,3286.22
  Top Layer w20: J1.A12 3855.91,3309.06 J1.S1@3878.74,3286.22
  Bottom Layer w6: v1(3705.51,3130.91) 3715.35,3121.06 IC1.6 ; C1.1 3751.07,3242.63 3847.16,3242.63 3878.74,3274.21 J1.S1@3878.74,3286.22
  other v1: 3814.17,3072.24 3783.07,3074.61 3946.46,3093.9 3475.2,3095.87 3398.03,3137.2 4024.41,3136.81 3510.63,3186.42 3618.9,3187.6 3448.82,3248.23 3448.82,3280.91 3448.82,3312.01 3272.44,3474.21 3497.5,3485.04 3574.8,3517.52 3609.06,3517.52 4133.86,3574.61 4131.89,3612.4 3919.29,3691.14 4125.98,3692.32 3897.5,3785.04 3997.5,3785.04 3827.56,3812.8 3455.91,3829.33 3492.52,3830.91 3455.12,3856.89 3489.37,3857.68 3823.62,3874.61 3728.35,3920.28 3726.77,3962.01 3279.13,3993.9 3723.62,4047.83 3728.35,4206.5 3728.35,4239.17
NET-(BZ1-+): BZ1.1 Q1.3 | length 238.8
  Top Layer w30: BZ1.1 3859.16,3915.84 3905.61,3869.39 Q1.3
NET-(D1-A): C1.2 D1.2 IC1.1 IC1.2 J1.A4 J1.A9 J1.B4 J1.B9 | length 703.2
  Top Layer w10: D1.2 3782.28,3391.54 3803.15,3370.67 J1.A9
  Top Layer w22: v1(3601.61,3353.96) 3614.17,3341.39 J1.A4 ; J1.A9 3803.15,3350.2
  Top Layer w25: 3803.15,3350.2 v1(3822.05,3369.09)
  Bottom Layer w6: IC1.1 3686.22,3189.96 IC1.2
  Bottom Layer w25: v1(3601.61,3353.96) 3601.61,3353.71 3660.24,3295.08 3676.38,3295.08 3684.25,3287.2 C1.2 3684.25,3272.24 3712.99,3300.98 3792.13,3300.98 3822.05,3330.91 v1(3822.05,3369.09)
  Bottom Layer w30: C1.2 3684.25,3191.93 3686.22,3189.96
NET-(D1-K): D1.1 R3.2 | length 60.7
  Top Layer w10: R3.2 3618.31,3391.54 D1.1
NET-(D2-BA): D2.3 R13.2 | length 63.9
  Top Layer w10: D2.3 3452.36,4016.34 v1(3453.54,4015.16)
  Bottom Layer w10: v1(3453.54,4015.16) 3466.34,4015.16 R13.2
NET-(D2-GA): D2.2 R12.2 | length 309.9
  Top Layer w10: v1(3320.47,3996.65) 3320.47,3986.42 3325.98,3980.91 D2.2
  Bottom Layer w10: v1(3320.47,3996.65) 3320.47,4064.76 3335.43,4079.72 3380.31,4124.61 R12.2
NET-(D2-RA): D2.1 R11.2 | length 138.5
  Top Layer w10: D2.1 3388.58,4038.78 v1(3388.58,4048.62)
  Bottom Layer w10: v1(3388.58,4048.62) 3403.54,4063.58 R11.2
NET-(D3-BA): D3.3 R16.2 | length 70.8
  Top Layer w10: v1(3964.57,3972.64) 3987.8,3972.64 D3.3
  Bottom Layer w10: R16.2 3947.44,3991.73 3961.81,3977.36 3961.81,3975.39 v1(3964.57,3972.64)
NET-(D3-GA): D3.2 R15.2 | length 160.7
  Top Layer w10: v1(4026.38,4062.01) 4026.38,4041.14 D3.2
  Bottom Layer w10: R15.2 3964.96,4123.43 v1(4026.38,4062.01)
NET-(D3-RA): D3.1 R14.2 | length 207.2
  Top Layer w10: D3.1 4053.94,3983.66 v1(4085.83,3983.66)
  Bottom Layer w10: R14.2 3983.07,4062.4 4011.02,4034.45 4061.81,3983.66 v1(4085.83,3983.66)
NET-(D4-BA): D4.3 R19.2 | length 52.5
  Top Layer w10: D4.3 3384.65,3310.43 R19.2
NET-(D4-GA): D4.2 R18.2 | length 61.6
  Top Layer w10: D4.2 3326.77,3228.74 R18.2
NET-(D4-RA): D4.1 R17.2 | length 52.5
  Top Layer w10: R17.2 3324.02,3310.43 D4.1
NET-(D5-BA): D5.3 R22.2 | length 74.8
  Top Layer w10: R22.2 3976.18,3231.1 3996.06,3250.98 D5.3
NET-(D5-GA): D5.2 R21.2 | length 57.5
  Top Layer w10: R21.2 4051.18,3355.12 D5.2
NET-(D5-RA): D5.1 R20.2 | length 135.6
  Top Layer w10: D5.1 4090.16,3272.24 4106.3,3288.39 R20.2
NET-(IC1-PROG): IC1.8 R4.2 | length 56.7
  Bottom Layer w10: R4.2 3622.05,3071.85 IC1.8
NET-(IC1-STAT): IC1.5 R3.1 | length 621
  Top Layer w10: v1(3522.83,3361.61) 3523.43,3361.61 R3.1
  Bottom Layer w10: v1(3522.83,3361.61) 3500.79,3339.57 3500.79,3317.52 3500.79,3242.72 3527.95,3215.55 3550,3215.55 3573.23,3192.32 3573.23,3044.68 3590.16,3027.76 3729.53,3027.76 3735.04,3033.27 IC1.5
NET-(IC3-VDD): IC3.1 R23.1 | length 70.6
  Top Layer w15: IC3.1 4088.48,3725.79 R23.1
NET-(J1-CC1): J1.A5 R2.2 | length 279.7
  Top Layer w10: R2.2 3486.46,3410 3486.46,3409.8 v1(3506.69,3389.57) ; v1(3651.97,3358.46) 3659.45,3350.98 J1.A5
  Bottom Layer w10: v1(3506.69,3389.57) 3507.09,3389.96 3648.03,3389.96 3651.97,3386.02 v1(3651.97,3358.46)
NET-(J1-CC2): J1.B5 R1.2 | length 370.9
  Top Layer w8: J1.B5 3777.56,3344.68 3764.17,3358.07 3716.93,3358.07 3709.45,3365.55 3709.45,3413.58 3753.15,3457.28 3884.84,3457.28 R1.2
NET-(Q1-B): Q1.1 R8.2 | length 72.4
  Top Layer w10: Q1.1 4097.54,3831.99 R8.2 R8.2@4098.62,3833.46
UNCONNECTED-(IC1-NC-PAD7): IC1.7
UNCONNECTED-(J1-D+-PADA6): J1.A6
UNCONNECTED-(J1-D+-PADB6): J1.B6
UNCONNECTED-(J1-D--PADA7): J1.A7
UNCONNECTED-(J1-D--PADB7): J1.B7
UNCONNECTED-(J1-SBU1-PADA8): J1.A8
UNCONNECTED-(J1-SBU2-PADB8): J1.B8
UNCONNECTED-(U1-PA1-PAD7): U1.7
UNCONNECTED-(U1-PA4-PAD10): U1.10
UNCONNECTED-(U1-PA5-PAD11): U1.11
UNCONNECTED-(U1-PA8-PAD18): U1.18
UNCONNECTED-(U1-PA9-PAD19): U1.19
UNCONNECTED-(U1-PA10-PAD20): U1.20
UNCONNECTED-(U1-PA11-PAD21): U1.21
UNCONNECTED-(U1-PA12-PAD22): U1.22
UNCONNECTED-(U1-PA15-PAD25): U1.25
UNCONNECTED-(U1-PB5-PAD28): U1.28
UNCONNECTED-(U1-PB6-PAD29): U1.29
UNCONNECTED-(U1-PB7-PAD30): U1.30
UNCONNECTED-(U1-PC14-PAD2): U1.2
UNCONNECTED-(U1-PC15-PAD3): U1.3
pads on no net: J1. J2.6 U1.

## Polygon pours and split planes (outlines as drawn)
GND on Top Layer (solid, remove dead copper, pour order 0): 3157.09,3969.49 3208.27,4044.29 3260.63,4101.77 3316.93,4149.8 3383.86,4195.87 3453.15,4230.91 3512.6,4253.74 3564.57,4267.91 3614.57,4277.76 3677.17,4283.27 3740.94,4283.66 3811.42,4276.97 3902.76,4255.31 3988.58,4220.67 4063.39,4178.15 4149.21,4109.65 4203.15,4051.38 4237.4,4006.89 4274.41,3944.68 4304.72,3880.51 4328.35,3808.46 4344.09,3730.51 4349.21,3667.91 4348.82,3614.76 4343.31,3551.77 4328.35,3480.12 4305.51,3410.43 4278.74,3351.38 4245.67,3293.9 4205.91,3239.96 4159.45,3188.78 4116.93,3150.2 4062.2,3109.65 4014.96,3081.3 3962.6,3056.1 3886.22,3028.15 3830.31,3015.55 3754.72,3005.31 3676.38,3004.13 3622.83,3009.25 3542.52,3025.39 3460.63,3052.95 3366.54,3102.56 3288.58,3159.65 3214.96,3236.02 3161.02,3311.22 3120.87,3390.35 3096.46,3456.5 3078.74,3527.36 3069.68,3597.05 3067.72,3664.37 3074.41,3738.39 3090.16,3813.19 3121.26,3901.38 3149.21,3956.5
GND on Bottom Layer (solid, remove dead copper, pour order 2): 3157.09,3969.49 3208.27,4044.29 3260.63,4101.77 3316.93,4149.8 3383.86,4195.87 3453.15,4230.91 3512.6,4253.74 3564.57,4267.91 3614.57,4277.76 3677.17,4283.27 3740.94,4283.66 3811.42,4276.97 3902.76,4255.31 3988.58,4220.67 4063.39,4178.15 4149.21,4109.65 4203.15,4051.38 4237.4,4006.89 4274.41,3944.68 4304.72,3880.51 4328.35,3808.46 4344.09,3730.51 4349.21,3667.91 4348.82,3614.76 4343.31,3551.77 4328.35,3480.12 4305.51,3410.43 4278.74,3351.38 4245.67,3293.9 4205.91,3239.96 4159.45,3188.78 4116.93,3150.2 4062.2,3109.65 4014.96,3081.3 3962.6,3056.1 3886.22,3028.15 3830.31,3015.55 3754.72,3005.31 3676.38,3004.13 3622.83,3009.25 3542.52,3025.39 3460.63,3052.95 3366.54,3102.56 3288.58,3159.65 3214.96,3236.02 3161.02,3311.22 3120.87,3390.35 3096.46,3456.5 3078.74,3527.36 3069.68,3597.05 3067.72,3664.37 3074.41,3738.39 3090.16,3813.19 3121.26,3901.38 3149.21,3956.5

## Keep-outs
Board Outline Layer:
  circle w1.97: c3708.66,3644.29 r639.76

## Silkscreen, mask and mechanical layers (free items; w line width, h text height)
Bottom Silkscreen Layer:
  text "B-" at 3488.19,3118.31 h30
  text "B+" at 3998.82,3116.34 h30